# Altium PCB Control_Board.PcbDoc (part 1 of 2)
Units mm, origin at the board's own origin, x right, y up, seen from the top; angles counter-clockwise.
Board outline 126.25 x 36.25 mm, 2 copper layers (Top Layer, Bottom Layer); 76 components, 131 nets, 425 pads, 63 vias.
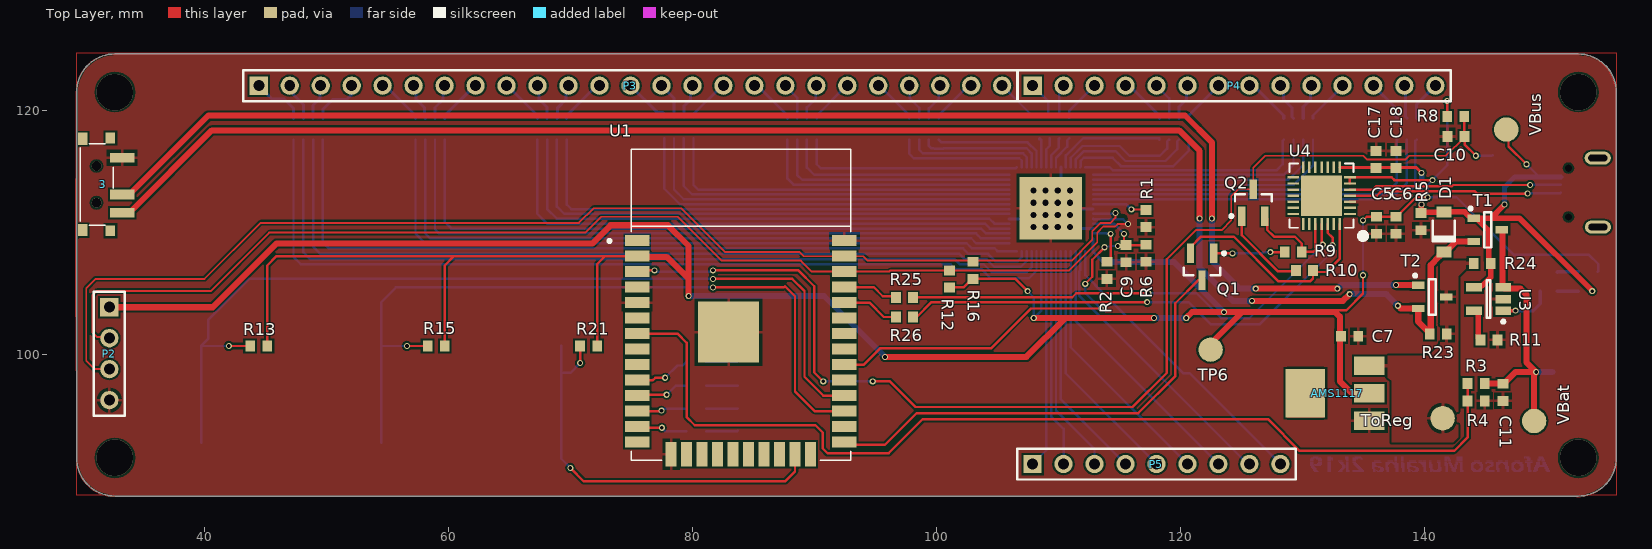
[diagram p0: Top Layer view]
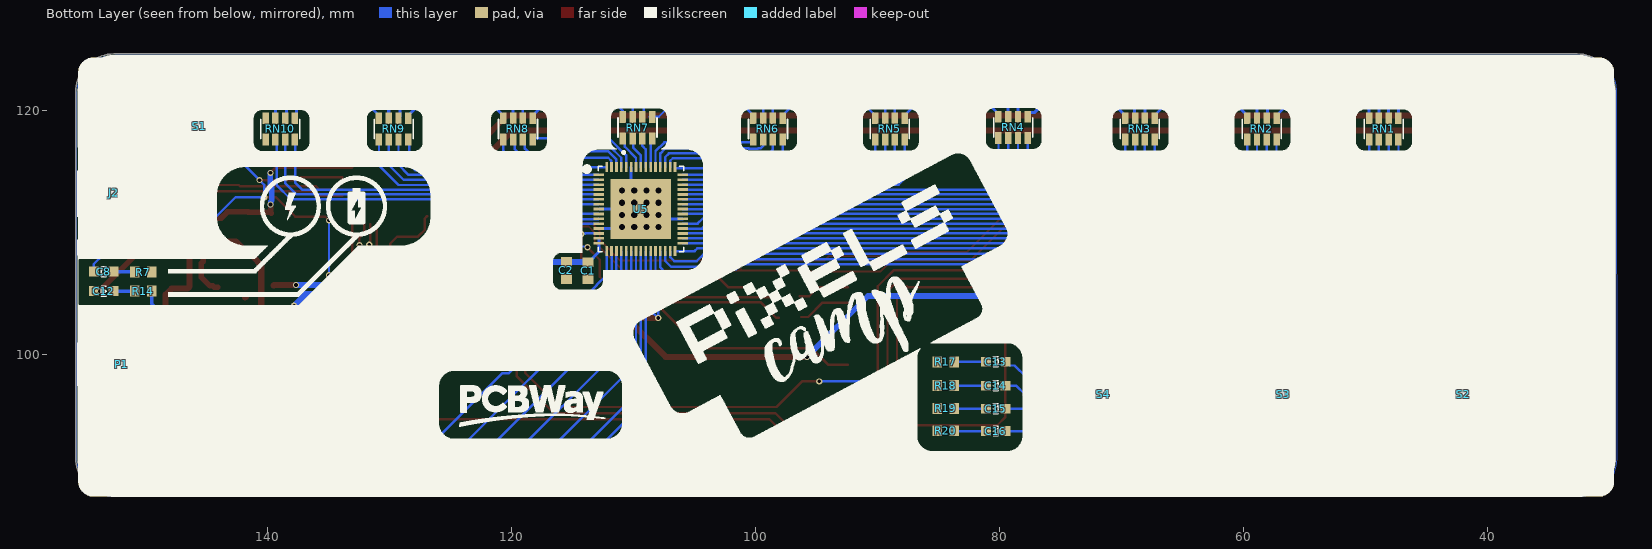
[diagram p1: Bottom Layer view, seen from below]
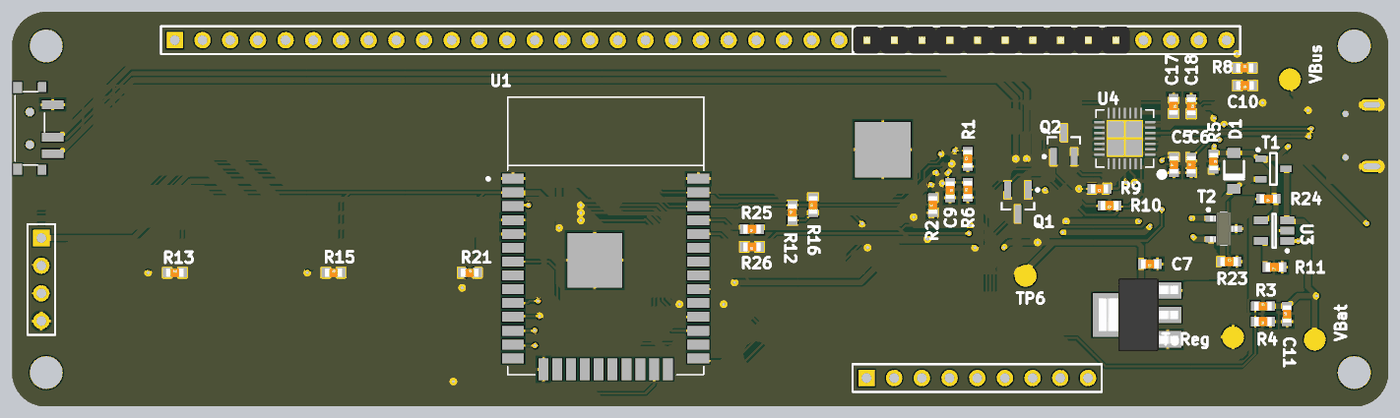
[diagram p3: 3D render of the assembled board from above, using the file's embedded part models]

## Layer stack, top to bottom
Top Solder: solder mask 0.0102, Solder Resist, Dk 3.5
Top Layer: signal copper 0.0356
Dielectric 1: dielectric 0.32, FR-4, Dk 4.8
Bottom Layer: signal copper 0.0356
Bottom Solder: solder mask 0.0102, Solder Resist, Dk 3.5

## Board outline
32.65,88.395 cw(c32.65,91.522) 29.523,91.522 29.523,121.522 cw(c32.65,121.522) 32.65,124.649 152.65,124.649 cw(c152.65,121.522) 155.777,121.522 155.777,91.522 cw(c152.65,91.522) 152.65,88.395

## Design rules (kind name [scope] priority, off if disabled: settings)
Clearance [All] p1: gap=0.152 ignorepadtopadclearanceinfootprint=FALSE except(0.089: Arc-Arc Arc-Track Track-Track)
ComponentClearance [All] p1: gap=0 collisioncheckmode=3 verticalgap=0 showdistances=FALSE
PlaneConnect PlaneConnect_1 [InNet('GND')] p1: planeconnectstyle=Relief reliefexpansion=0.508 reliefentries=4 reliefconductorwidth=0.254 reliefairgap=0.254
PlaneConnect [All] p2: planeconnectstyle=Direct reliefexpansion=0.508 reliefentries=4 reliefconductorwidth=0.254 reliefairgap=0.254
PolygonConnect PolygonConnect_1 [InNet('GND')] p1: connectstyle=Relief reliefconductorwidth=0.254 reliefentries=4 polygonreliefangle="90 Angle" airgapwidth=0.254
PolygonConnect [All] p2: connectstyle=Relief reliefconductorwidth=0.254 reliefentries=4 polygonreliefangle="90 Angle" airgapwidth=0.254
RoutingCorners [All] p1: cornerstyle=Round minsetback=2.54 maxsetback=2.54
RoutingLayers RoutingLayers_1 [All] p1: top layer_v5=TRUE bottom layer_v5=TRUE
RoutingVias [All] p1: holewidth=0.3 width=0.5 viastyle="Through Hole" minholewidth=0.3 minwidth=0.5 maxholewidth=0.3 maxwidth=0.5
ShortCircuit [All] p1: allowed=TRUE
SolderMaskExpansion [All] p1: expansion=0.102
Width [All] p1: maxlimit=2 minlimit=0.089 preferedwidth=0.254
25 further rules are at their usual default settings.

## Components (designator, comment, footprint, x,y, rotation, side; value= is the part's Value field where it differs from the comment)
3 "Footprint of the VIMEX MSK-12C02 SPDT SMD Switch Created by mzst on 17-Jan-2016" MSK-12C02 31.15,113.95 r270 top
AMS1117 "AMS1117" SOT-223-3 136.275,93.575 r90 top
C1 "0.1uF" "C 0603 / 1608" 113.75,106.875 r90 bottom
C2 "1uF" "C 0603 / 1608" 115.525,106.9 r90 bottom
C5 "10uF" "C 0603 / 1608" 136.1,110.6 r90 top
C6 "1uF" "C 0603 / 1608" 137.7,110.6 r90 top
C7 "22uF" "C 0603 / 1608" 133.9,101.5 r180 top
C8 "LED" "LED 0603(2)" 153.5,106.8 r180 bottom
C9 "0.1uF" "C 0603 / 1608" 115.575,108.275 r270 top
C10 "100nF" "C 0603 / 1608" 142.625,117.875 r180 top
C11 "10uF" "C 0603 / 1608" 146.475,96.895 r90 top
C12 "LED" "LED 0603(2)" 153.5,105.2 r180 bottom
C13 "LED" "LED 0603(2)" 80.275,99.4 r0 bottom
C14 "LED" "LED 0603(2)" 80.285,97.45 r0 bottom
C15 "LED" "LED 0603(2)" 80.285,95.55 r0 bottom
C16 "LED" "LED 0603(2)" 80.285,93.725 r0 bottom
C17 "10uF" "C 0603 / 1608" 136.074,116 r270 top
C18 "1uF" "C 0603 / 1608" 137.7,115.987 r270 top
D1 "B5819W" MCC-SOD123_V 141.625,110.05 r270 top
J2 "MicroUsb" USB-MICROB 155.702,116.48 r270 bottom
P1 "53261-0271" MOLX-53261-0271_V 152,99.2 r270 bottom
P2 "Header 4" HDR1X4 32.2,103.88 r270 top
P3 "Header 25" HDR1X25 44.45,122.047 r0 top locked
P4 "Header 14" HDR1X14 107.91,122.047 r0 top locked
P5 "Header 9" HDR1X9 107.9,91.022 r0 top
Q1 "MMBT2222LT1G" ONSC-SOT-23-3-318-08_M 121.8,107.2 r270 top
Q2 "MMBT2222LT1G" ONSC-SOT-23-3-318-08_M 126,112.45 r90 top
R1 "Res1" "C 0603 / 1608" 117.2,111.15 r90 top value=100k
R2 "Res1" "C 0603 / 1608" 114,106.9 r90 top value=10k
R3 "Res1" "C 0603 / 1608" 144.275,97.625 r0 top value=100k
R4 "Res1" "C 0603 / 1608" 144.275,96.2 r180 top value=100k
R5 "Res1" "C 0603 / 1608" 139.75,110.9 r270 top value=10k
R6 "Res1" "C 0603 / 1608" 117.2,108.3 r90 top value=100k
R7 "Res1" "C 0603 / 1608" 150.225,106.75 r180 bottom value=1k
R8 "Res1" "C 0603 / 1608" 142.6,119.5 r0 top value=10k
R9 "Res1" "C 0603 / 1608" 129.276,108.412 r180 top value=10k
R10 "Res1" "C 0603 / 1608" 130.2,106.873 r180 top value=10k
R11 "Res1" "C 0603 / 1608" 145.325,101.2 r180 top value=4.7k
R12 "Res1" "C 0603 / 1608" 101.1,106.2 r90 top value=4.7k
R13 "Res1" "C 0603 / 1608" 44.45,100.7 r0 top value=10k
R14 "Res1" "C 0603 / 1608" 150.225,105.2 r0 bottom value=1k
R15 "Res1" "C 0603 / 1608" 59,100.7 r0 top value=10k
R16 "Res1" "C 0603 / 1608" 103,106.9 r90 top value=4.7k
R17 "Res1" "C 0603 / 1608" 84.425,99.4 r0 bottom value=1k
R18 "Res1" "C 0603 / 1608" 84.425,97.45 r0 bottom value=1k
R19 "Res1" "C 0603 / 1608" 84.425,95.575 r0 bottom value=1k
R20 "Res1" "C 0603 / 1608" 84.425,93.75 r0 bottom value=1k
R21 "Res1" "C 0603 / 1608" 71.5,100.7 r0 top value=10k
R23 "Res1" "C 0603 / 1608" 141.175,101.7 r0 top value=OPEN
R24 "Res1" "C 0603 / 1608" 144.775,107.475 r180 top value=OPEN
R25 "Res1" "C 0603 / 1608" 97.4,104.68 r180 top value=470
R26 "Res1" "C 0603 / 1608" 97.4,103.08 r180 top value=470
RN1 "742C083121JP" RESARRAY(4x0603) 48.5,118.5 r180 bottom
RN2 "742C083121JP" RESARRAY(4x0603) 58.5,118.5 r180 bottom
RN3 "742C083121JP" RESARRAY(4x0603) 68.5,118.5 r180 bottom
RN4 "742C083121JP" RESARRAY(4x0603) 78.9,118.625 r180 bottom
RN5 "742C083121JP" RESARRAY(4x0603) 89,118.5 r180 bottom
RN6 "742C083121JP" RESARRAY(4x0603) 99,118.5 r180 bottom
RN7 "742C083121JP" RESARRAY(4x0603) 109.7,118.6 r180 bottom
RN8 "742C083121JP" RESARRAY(4x0603) 119.5,118.5 r180 bottom
RN9 "742C083121JP" RESARRAY(4x0603) 129.7,118.5 r180 bottom
RN10 "742C083121JP" RESARRAY(4x0603) 139,118.5 r180 bottom
S1 "Switch" PUSH_SMD_3x4 147.125,121.2 r270 bottom
S2 "DTSM-6" DTSM-6 42,96.755 r90 bottom
S3 "DTSM-6" DTSM-6 56.75,96.755 r90 bottom
S4 "DTSM-6" DTSM-6 71.5,96.755 r90 bottom
T1 "DMP2045U" SOT95P237X112-3N 145.225,110.225 r0 top
T2 "DMP2045U" SOT95P237X112-3N 140.675,104.725 r0 top
ToReg "Test pad" TP20R 141.525,94.775 r0 top
TP6 "Test pad" TP20R 122.5,100.4 r0 top
U1 "ESP32-WROOM-32D" MODULE_ESP32-WROOM-32D 83.975,104.075 r0 top
U3 "MCP73831T-2ADI/OT" SOT-23-OT5_M 145.3,104.55 r180 top
U4 "CP2102-GM" QFN28_5X5 131.6,113.024 r180 top value=Value
U5 "IS31FL3741" QFN40P700X700X80-61N 109.425,111.93 r180 bottom
VBat "Test pad" TP20R 149.025,94.55 r0 top
VBus "Test pad" TP20R 146.75,118.45 r0 top

## Footprints (in the part's own frame and the unit in brackets; to place one, negate y for a bottom-side part, rotate by r counter-clockwise, add the part's x,y. Pads: shape width x height; smd on the part's side, far side on the other; paste and mask are expansions set on the pad)
"C 0603 / 1608" [mm] "Capacitor 0603 / 1608 (1.6 x 0.8 mm)"
  rect 0.8x0.9 smd: 1(-0.7,0) 2(0.7,0)
  body extent -0.8,-0.4 0.8,0.4, height 0.3
DTSM-6 [mil]
  rect 61.02x51.18 smd: 1(-156.5,88.58) 2(156.5,88.58) 3(-156.5,-88.58) 4(156.5,-88.58)
HDR1X4 [mm] "Connector; Header; 4 Position"
  rect 1.5x1.5 hole 0.9: 1(0,0)
  round 1.5 hole 0.9: 2(2.54,0) 3(5.08,0) 4(7.62,0)
  silkscreen extent -1.27,-1.27 8.89,1.27, body extent -1.27,-1.24 8.89,1.25, height 8.54
HDR1X9 [mm] "Connector; Header; 9 Position"
  rect 1.5x1.5 hole 0.9: 1(0,0)
  round 1.5 hole 0.9: 2(2.54,0) 3(5.08,0) 4(7.62,0) 5(10.16,0) 6(12.7,0) 7(15.24,0) 8(17.78,0) 9(20.32,0)
  silkscreen extent -1.27,-1.27 21.59,1.27, body extent -1.27,-1.24 21.59,1.25, height 8.54
HDR1X14 [mm] "Connector; Header; 14 Position"
  rect 1.5x1.5 hole 0.9: 1(0,0)
  round 1.5 hole 0.9: 2(2.54,0) 3(5.08,0) 4(7.62,0) 5(10.16,0) 6(12.7,0) 7(15.24,0) 8(17.78,0) 9(20.32,0) 10(22.86,0) 11(25.4,0) 12(27.94,0) 13(30.48,0) 14(33.02,0)
  silkscreen extent -1.27,-1.27 34.29,1.27, body extent -1.25,-1.24 34.29,1.25, height 8.54
HDR1X25 [mm] "Connector; Header; 25 Position"
  rect 1.5x1.5 hole 0.9: 1(0,0)
  round 1.5 hole 0.9: 2(2.54,0) 3(5.08,0) 4(7.62,0) 5(10.16,0) 6(12.7,0) 7(15.24,0) 8(17.78,0) 9(20.32,0) 10(22.86,0) 11(25.4,0) 12(27.94,0) 13(30.48,0) 14(33.02,0) 15(35.56,0) 16(38.1,0) 17(40.64,0) 18(43.18,0) 19(45.72,0) 20(48.26,0) 21(50.8,0) 22(53.34,0) 23(55.88,0) 24(58.42,0) 25(60.96,0)
  silkscreen extent -1.27,-1.27 62.23,1.27
"LED 0603(2)" [mm]
  rect 0.8x0.8 smd: 1(-0.762,0) 2(0.838,0)
  silkscreen extent -0.16,-0.4 0.24,0.4
MCC-SOD123_V [mil] "SOD123, 2-Leads, Body 2.7x1.6mm, Height 1.35mm"
  rect 35.98x47.99 smd: 1(-64.5,0) 2(64.5,0)
  silkscreen extent -36,-35 31,35, body extent -53,-31 53,31, height 53
MODULE_ESP32-WROOM-32D [mm]
  rect 2x0.9 smd: 1(-8.5,5.26) 2(-8.5,3.99) 3(-8.5,2.72) 4(-8.5,1.45) 5(-8.5,0.18) 6(-8.5,-1.09) 7(-8.5,-2.36) 8(-8.5,-3.63) 9(-8.5,-4.9) 10(-8.5,-6.17) 11(-8.5,-7.44) 12(-8.5,-8.71) 13(-8.5,-9.98) 14(-8.5,-11.25) 25(8.5,-11.25) 26(8.5,-9.98) 27(8.5,-8.71) 28(8.5,-7.44) 29(8.5,-6.17) 30(8.5,-4.9) 31(8.5,-3.63) 32(8.5,-2.36) 33(8.5,-1.09) 34(8.5,0.18) 35(8.5,1.45) 36(8.5,2.72) 37(8.5,3.99) 38(8.5,5.26)
  rect 0.9x2 smd: 15(-5.715,-12.25) 16(-4.445,-12.25) 17(-3.175,-12.25) 18(-1.905,-12.25) 19(-0.635,-12.25) 20(0.635,-12.25) 21(1.905,-12.25) 22(3.175,-12.25) 23(4.445,-12.25) 24(5.715,-12.25)
  rect 5x5 smd: 39(-1,-2.24)
  silkscreen extent -10.88,-12.75 9,12.75
MOLX-53261-0271_V [mm] "Header, 2-Leads, Pitch 1.25mm"
  rect 0.8x1.6 smd: 1(-0.625,1.45) 2(0.625,1.45)
  rect 2.1x3 smd: MP1(-3.175,-1.45) MP2(3.175,-1.45)
  silkscreen extent -1.72,-3.55 1.73,2.92, body extent -3.82,-3.55 3.83,1.65, height 3.41
MSK-12C02 [mil]
  round 31.5 hole 31.5: 1(-59.06,0) 1(59.06,0)
  rect 31.5x78.74 smd: COM(32.4,82.68) L1(91.46,82.68) L2(-85.71,82.68)
  rect 39.37x31.5 smd: GND@1(-147.64,-44.29) GND@4(147.64,-44.29)
  rect 35.43x31.5 smd: GND@2(-149.61,44.29) GND@3(149.61,44.29)
  silkscreen extent -132,-53 132,53, body extent -152,-110 152,87, height 46
ONSC-SOT-23-3-318-08_M [mm] "SOT23, 3-Leads, Body 3.04x1.4mm, Pitch 0.95mm, IPC Low Density"
  rect 1.6x0.6 smd: 1(-1.1,0.95) 2(-1.1,-0.95) 3(1.1,0)
  silkscreen extent -1.22,-1.5 0.7,1.93, body extent -0.7,-1.52 0.7,1.52, height 1.11
PUSH_SMD_3x4 [mm]
  rect 1.35x1.35 smd: 1(0.15,1.5) 2(4.85,1.5)
  silkscreen extent 0,0 5,3
QFN28_5X5 [mil]
  rect 38x8 smd paste+0 mask+0: 1(-91.5,59.06) 2(-91.5,39.37) 3(-91.5,19.69) 4(-91.5,0) 5(-91.5,-19.68) 6(-91.5,-39.37) 7(-91.5,-59.06) 15(91.5,-59.06) 16(91.5,-39.37) 17(91.5,-19.68) 18(91.5,0) 19(91.5,19.69) 20(91.5,39.37) 21(91.5,59.06)
  rect 8x38 smd paste+0 mask+0: 8(-59.06,-91.5) 9(-39.37,-91.5) 10(-19.69,-91.5) 11(0,-91.5) 12(19.68,-91.5) 13(39.37,-91.5) 14(59.06,-91.5) 22(59.06,91.5) 23(39.37,91.5) 24(19.68,91.5) 25(0,91.5) 26(-19.69,91.5) 27(-39.37,91.5) 28(-59.06,91.5)
  rect 132x132 smd paste-65.5 mask+0: 29(0,0)
  silkscreen extent -148,-104 104,145, body extent 0,0 10,10, height 10
QFN40P700X700X80-61N [mm]
  rect 0.84x0.22 smd: 1(-3.445,2.8) 2(-3.445,2.4) 3(-3.445,2) 4(-3.445,1.6) 5(-3.445,1.2) 6(-3.445,0.8) 7(-3.445,0.4) 8(-3.445,0) 9(-3.445,-0.4) 10(-3.445,-0.8) 11(-3.445,-1.2) 12(-3.445,-1.6) 13(-3.445,-2) 14(-3.445,-2.4) 15(-3.445,-2.8) 31(3.445,-2.8) 32(3.445,-2.4) 33(3.445,-2) 34(3.445,-1.6) 35(3.445,-1.2) 36(3.445,-0.8) 37(3.445,-0.4) 38(3.445,0) 39(3.445,0.4) 40(3.445,0.8) 41(3.445,1.2) 42(3.445,1.6) 43(3.445,2) 44(3.445,2.4) 45(3.445,2.8)
  rect 0.22x0.84 smd: 16(-2.8,-3.445) 17(-2.4,-3.445) 18(-2,-3.445) 19(-1.6,-3.445) 20(-1.2,-3.445) 21(-0.8,-3.445) 22(-0.4,-3.445) 23(0,-3.445) 24(0.4,-3.445) 25(0.8,-3.445) 26(1.2,-3.445) 27(1.6,-3.445) 28(2,-3.445) 29(2.4,-3.445) 30(2.8,-3.445) 46(2.8,3.445) 47(2.4,3.445) 48(2,3.445) 49(1.6,3.445) 50(1.2,3.445) 51(0.8,3.445) 52(0.4,3.445) 53(0,3.445) 54(-0.4,3.445) 55(-0.8,3.445) 56(-1.2,3.445) 57(-1.6,3.445) 58(-2,3.445) 59(-2.4,3.445) 60(-2.8,3.445)
  rect 4.95x4.95 smd: 61(0,0)
  silkscreen extent -4.62,-3.5 3.5,3.5
RESARRAY(4x0603) [mm]
  rect 0.53x0.97 smd: 1(-1.2,-0.875) 2(-0.4,-0.875) 3(0.4,-0.875) 4(1.2,-0.875) 5(1.2,0.875) 6(0.4,0.875) 7(-0.4,0.875) 8(-1.2,0.875)
  silkscreen extent -1.6,-2.13 1.6,0.8
SOT95P237X112-3N [mm] "SOT, 0.95mm, pitch; 3 pin,1.30mm W X 2.92mm L X 1.12mm H body, IPC Medium Density"
  rect 1.05x0.6 smd: 1(-1.15,0.95) 2(-1.15,-0.95) 3(1.15,0)
  silkscreen extent -1.52,-1.45 0.3,1.87, body extent -1.25,-1.5 1.25,1.5, height 1.1
SOT-23-OT5_M [mm] "SOT23, 5-Leads, Body 2.9x1.7mm, Pitch 0.95mm, Lead Span 2.8mm, IPC Low Density"
  rect 1.3x0.7 smd: 1(-1.2,0.95) 2(-1.2,0) 3(-1.2,-0.95) 4(1.2,-0.95) 5(1.2,0.95)
  silkscreen extent -1.33,-1.55 0.15,1.97, body extent -0.9,-1.55 0.9,1.55, height 1.45
SOT-223-3 [mm]
  rect 1.5x2.5 smd: 1(1,0.75) 2(3.25,0.75) 3(5.5,0.75)
  rect 4x3.25 smd: ""(3.25,6)
  Top Layer region: 1.25,4.5 5.25,4.5 5.25,7.5 1.25,7.5
  body extent -0.1,-0.22 6.6,7.08, height 1.8
TP20R [mm]
  rrect100% 2x2 smd paste-1: TP(0,0)
USB-MICROB [mm] "G19"
  rect 0.4x2.5 smd: 1(1.9,4.7) 2(2.55,4.7) 3(3.2,4.7) 4(3.85,4.7) 5(4.5,4.7)
  rect 1x1 smd: ""(0.01,4) ""(6.39,4)
  rrect100% 1.05x2.15 hole 0.55 slot 1.55 at 90 deg: ""(0.37,1.45) ""(6.03,1.44)
  round 0 hole 0.6: ""(1.2,3.86) ""(5.2,3.86)

## Part data
3: library part MSK-12C02_SMD_SPDT_SWITCH
AMS1117: "LDO 3.3V/5V/12V"
C1 C2 C5 C6 C7 C9 C10 C11 C17 C18: library part Capacitor
D1: library part CMP-2100-03587-1, "Schottky Barrier Rectifier, 1 A, 40 Vrm, -65 to 125 degC, 2-Pin SOD123, RoHS, Tape and Reel", Manufacturer="Micro Commercial Components", Package Description="2-Pin Small Outline Diode, Body 2.7 x 1.6 mm, Height 1.35 mm", Package Reference=SOD123, Datasheet URL=http://www.mccsemi.com/up_pdf/B5817W-B5819W(SOD-123).pdf, Datasheet Version="Rev. B, 01/2013", Manufacturer URL=http://www.mccsemi.com/, Package URL=http://www.mccsemi.com/up_pdf/1N4448W(SOD-123).pdf
J2: "10103594-0001LF / Conn Micro USB Type B RCP 5 POS 0.65mm Solder RA SMD 5 Terminal 1 Port T/R", Package=None, Availability=Unavailable, MF="Amphenol ICC", MP=10103594-0001LF, Price=None, SnapEDA_Link=https://www.snapeda.com/parts/10103594-0001LF/Amphenol%20ICC/view-part/?ref=snap
P1: library part CMP-2000-05633-1, "PicoBlade(TM) Header, Right Angle, -40 to 85 degC, 2-Pin SMD, RoHS, Tape and Reel", Current - Max=1A, Manufacturer=Molex, Package Description="2-Leads Header, Pitch 1.25 mm, Mated Height 3.4 mm", Package Version="Rev. H, 11/2014", Voltage - Max=125V, =0532610271, Brand=Molex, Contact Material=PhosphorBronze, Contact Plating=Tin, Current Rating=1A, Datasheet URL=http://www.molex.com/webdocs/datasheets/pdf/en-us/0532610271_PCB_HEADERS.pdf, Datasheet Version=03/2016, Factory Pack Quantity=1000, Housing Material=Thermoplastic, Manufacturer URL=http://www.molex.com/, Mounting Angle=Right, Mounting Style=SMD/SMT, Mounting Technology=SurfaceMount, Number of Positions=2, Number of Positions / Contacts=2, Number of Rows=1, Package Reference=53261-0271, Package URL=http://www.molex.com/pdm_docs/sd/532610271_sd.pdf, Packaging=Reel, Pitch=1.25mm, Product Category=1.25mmConnectors, Product Type=Headers, RoHS=Details, Series=53261, Termination Style=SMD, Tradename=PicoBlade, Type=Shrouded, Voltage Rating=125V
P2: "Header, 4-Pin", LatestRevisionDate=17-Jul-2002, LatestRevisionNote="Re-released for DXP Platform.", Publisher="Altium Limited"
P3: "Header, 25-Pin", LatestRevisionDate=17-Jul-2002, LatestRevisionNote="Re-released for DXP Platform.", Publisher="Altium Limited"
P4: "Header, 14-Pin", LatestRevisionDate=17-Jul-2002, LatestRevisionNote="Re-released for DXP Platform.", Publisher="Altium Limited"
P5: "Header, 9-Pin", LatestRevisionDate=17-Jul-2002, LatestRevisionNote="Re-released for DXP Platform.", Publisher="Altium Limited"
Q1 Q2: library part CMP-0722-00001-1, "General Purpose Transistor, NPN, 0.6 A IC Continuous, 3-Pin SOT23, RoHS, Tape and Reel", Manufacturer="ON Semiconductor", ComponentLink1Description="Manufacturer URL", ComponentLink1URL=http://www.onsemi.com/, ComponentLink2Description=Datasheet, ComponentLink2URL=http://www.onsemi.com/pub_link/Collateral/MMBT2222LT1-D.PDF, ComponentLink3Description="Package Specification", ComponentLink3URL=http://www.onsemi.com/pub_link/Collateral/MMBT2222LT1-D.PDF, DatasheetVersion="Rev. 10", FT="250 MHz", HFE Max.=300, HFE Min.=100, IC Continuous="0.6 A", Mounting Technology="Surface Mount", PackageDescription="3-Pin SOT23, Body 2.9 x 1.3 mm, Pitch 0.95 mm", PackageReference=SOT-23-3, PackageVersion="Rev. AP", Packing="Tape and Reel", PartNumber=MMBT2222LT1G, Polarity=NPN, PTM Max.="0.225 W", RoHS=TRUE, V(BR) CEO="30 V Min."
R1 R2 R3 R4 R5 R6 R7 R8 R9 R10 R11 R12 R13 R14 R15 R16 R17 R18 R19 R20 R21 R23 R24 R25 R26: "Resistor", LatestRevisionDate=17-Jul-2002, LatestRevisionNote="Re-released for DXP Platform.", PackageDescription="Axial Device, Thru-Hole; 2 Leads; 0.3 in Pin Spacing", PackageReference=AXIAL-0.3, Published=8-Jun-2000, Publisher="Altium Limited"
RN1 RN2 RN3 RN4 RN5 RN6 RN7 RN8 RN9 RN10: library part "Resistor Array 4x", "Res Thick Film Array 120 Ohm 5% 1/4W ±200ppm/°C ISOL Molded 8-Pin 1206_4 X 0603_ Concave SMD Paper T/R", Package="1206 CTS Components", Availability=Unavailable, MF="CTS Resistor", MP=742C083121JP, Price=None, SnapEDA_Link=https://www.snapeda.com/parts/742C083121JP/CTS%20Resistor%20Products/view-part/?ref=snap
S1: library part B3U-1000P, Manufacturer=Omron, DIGIKEY=SW1020CT-ND, MPN=B3U-1000P
T1 T2: library part Si2333CDS-T1-GE3, "P-CHANNEL MOSFET WITH DIODE", Case=SOT23-3, Manufacturer="VISHAY SILICONIX", Author="CERN DEM JLC", Bonding=No, ComponentHeight=1.12mm, Component Type=Standard, CreateDate=03/03/2011, Device=Si2333CDS-T1-GE3, HelpURL=\\cern.ch\dfs\Applications\Altium\Datasheets\Si2333CDS-T1-GE3.pdf, LatestRevisionDate=02/05/2011, Manufacturer Part Number=Si2333CDS-T1-GE3, Mounted=Yes, PackageDescription="SOT, 0.95mm, pitch; 3 pin,1.30mm W X 2.92mm L X 1.12mm H body, IPC Medium Density", Part Description="-12V -5.1A P-Channel  TrenchFET® Power MOSFET", Part Number=Si2333CDS-T1-GE3, Pin Count=3, PressFit=No, Sense=No, SMD=Yes, Socket=No
ToReg TP6 VBat VBus: library part TPTP20R
U1: "IC: SoC; GPIO, I2C, I2S, IR, SD, SDIO, SPI, UART; 2.7÷3.6VDC; 20dBm", Package="Module Espressif Systems", Availability=Warning, MF="Espressif Systems", MP=ESP32-WROOM-32D, Price="3.98 USD", SnapEDA_Link=https://www.snapeda.com/parts/ESP32-WROOM-32D/Espressif%20Systems/view-part/?ref=snap
U3: library part CMP-0133-00142-1, "Miniature Single-Cell, Fully Integrated Li-Ion, Li-Polymer Charge Management Controller, 4.2V, 5-Pin SOT-23, Industrial Temperature, Tape and Reel", Code_IPC=SOT23-5, DatasheetVersion="revE, Sep-2008", PackageDescription="5-Lead Plastic Small Outline Transistor (OT) [SOT-23]", PackageReference=SOT-23-OT5, PackageVersion="revBB, Aug-2009"
U4: "No Description Available", Built_By=EMA_UL_Team, Copyright="Copyright (C) 2018 Accelerated Designs. All rights reserved", Manufacturer_Part_Number=CP2102-GM, RefDes=RefDes, Type=DEV, Vendor="Silicon Labs"

## Free pads (board coordinates)
  round 1 hole 0.5: 0(107.965,113.45) 2(108.965,113.45) 3(109.965,113.45) 4(110.965,113.45) 5(110.965,112.45) 6(109.965,112.45) 7(108.965,112.45) 8(107.965,112.45) 9(107.965,111.45) 10(108.965,111.45) 11(109.965,111.45) 12(110.965,111.45) 13(110.965,110.45) 14(109.965,110.45) 15(108.965,110.45) 16(107.965,110.45)
  rect 5.1x5.1 smd: 0(109.4,112)

## Via types
v1: diameter 0.5, hole 0.3, Top Layer to Bottom Layer, 59 vias
v2: diameter 3, hole 3, Top Layer to Bottom Layer, 4 vias

## Nets (pads, with @x,y where several pads share a name; then routed paths per layer and width w, separated by ;. In a path a pad name is that pad's centre, name@x,y a point inside that pad or via, vN(x,y) a via of type N, cw(c..) or ccw(c..) an arc to the next point about the centre after c; other vN are vias at no path point)
CS1: P3.1 RN1.5 | length 4.4
  Bottom Layer w0.25: P3.1@44.45,122.047 45.56,120.937 46.563,120.937 47.3,120.2 RN1.5@47.3,119.375
CS2: P3.2 RN1.6 | length 3.1
  Bottom Layer w0.25: P3.2@46.99,122.047 46.99,121.61 48.1,120.5 RN1.6@48.1,119.375
CS3: P3.3 RN1.7 | length 2.9
  Bottom Layer w0.25: RN1.7@48.9,119.375 48.9,120.437 49.485,121.022 49.485,122.002 P3.3@49.53,122.047
CS4: P3.4 RN1.8 | length 4.3
  Bottom Layer w0.25: RN1.8@49.7,119.375 49.7,120.1 50.5,120.9 51.65,120.9 52.07,121.32 P3.4@52.07,122.047
CS5: P3.5 RN2.5 | length 3.9
  Bottom Layer w0.25: P3.5@54.61,122.047 54.848,122.047 57.3,119.595 RN2.5@57.3,119.375
CS6: P3.6 RN2.6 | length 3.1
  Bottom Layer w0.25: P3.6@57.15,122.047 57.355,121.842 57.355,120.922 58.042,120.235 58.042,119.433 RN2.6@58.1,119.375
CS7: P3.7 RN2.7 | length 3
  Bottom Layer w0.25: RN2.7@58.9,119.375 58.9,120.257 59.565,120.922 59.565,121.922 P3.7@59.69,122.047
CS8: P3.8 RN2.8 | length 3.8
  Bottom Layer w0.25: RN2.8@59.7,119.375 59.7,119.595 62.152,122.047 P3.8@62.23,122.047
CS9: P3.9 RN3.5 | length 3.8
  Bottom Layer w0.25: P3.9@64.77,122.047 64.848,122.047 67.3,119.595 RN3.5@67.3,119.375
CS10: P3.10 RN3.6 | length 3
  Bottom Layer w0.25: P3.10@67.31,122.047 67.435,121.922 67.435,120.922 68.1,120.257 RN3.6@68.1,119.375
CS11: P3.11 RN3.7 | length 3.1
  Bottom Layer w0.25: RN3.7@68.9,119.375 68.958,119.433 68.958,120.235 69.645,120.922 69.645,121.842 P3.11@69.85,122.047
CS12: P3.12 RN3.8 | length 3.9
  Bottom Layer w0.25: RN3.8@69.7,119.375 69.7,119.595 72.152,122.047 P3.12@72.39,122.047
CS13: P3.13 RN4.5 | length 4
  Bottom Layer w0.25: P3.13@74.93,122.047 77.117,119.86 77.56,119.86 77.7,119.72 RN4.5@77.7,119.5
CS14: P3.14 RN4.6 | length 3
  Bottom Layer w0.25: P3.14@77.47,122.047 78.5,121.017 RN4.6@78.5,119.5
CS15: P3.15 RN4.7 | length 2.8
  Bottom Layer w0.25: RN4.7@79.301,119.501 79.301,120.36 79.863,120.922 79.863,121.9 P3.15@80.01,122.047
CS16: P3.16 RN4.8 | length 3.6
  Bottom Layer w0.25: RN4.8@80.1,119.5 80.1,119.72 82.427,122.047 P3.16@82.55,122.047
CS17: P3.17 RN5.5 | length 3.9
  Bottom Layer w0.25: P3.17@85.09,122.047 85.348,122.047 87.8,119.595 RN5.5@87.8,119.375
CS18: P3.18 RN5.6 | length 3.1
  Bottom Layer w0.2: P3.18@87.63,122.047 88.6,121.077 RN5.6@88.6,119.375
CS19: P3.19 RN5.7 | length 3
  Bottom Layer w0.2: RN5.7@89.4,119.375 89.4,120.26 90.137,120.997 90.137,122.014 P3.19@90.17,122.047
CS20: P3.20 RN5.8 | length 3.7
  Bottom Layer w0.2: RN5.8@90.2,119.375 90.2,119.595 92.652,122.047 P3.20@92.71,122.047
CS21: P3.21 RN6.5 | length 3.8
  Bottom Layer w0.2: P3.21@95.25,122.047 95.348,122.047 97.8,119.595 RN6.5@97.8,119.375
CS22: P3.22 RN6.6 | length 3
  Bottom Layer w0.2: P3.22@97.79,122.047 97.843,121.994 97.843,120.997 98.6,120.24 RN6.6@98.6,119.375
CS23: P3.23 RN6.7 | length 3.1
  Bottom Layer w0.2: RN6.7@99.4,119.375 99.4,120.18 100.217,120.997 100.217,121.934 P3.23@100.33,122.047
CS24: P3.24 RN6.8 | length 3.9
  Bottom Layer w0.2: RN6.8@100.2,119.375 100.2,119.595 102.652,122.047 P3.24@102.87,122.047
CS25: P3.25 RN7.5 | length 4.3
  Bottom Layer w0.2: P3.25@105.41,122.047 107.957,119.5 RN7.5@108.7,119.5
CS26: P4.1 RN7.6 | length 2.8
  Bottom Layer w0.2: P4.1@107.91,122.047 109.2,120.757 RN7.6@109.2,119.8
CS27: P4.2 RN7.7 | length 2.5
  Bottom Layer w0.2: RN7.7@110.1,119.7 110.1,121.697 P4.2@110.45,122.047
CS28: P4.3 RN7.8 | length 3.3
  Bottom Layer w0.2: RN7.8@110.9,119.4 RN7.8@110.9,119.475 ; RN7.8@110.9,119.7 110.9,119.957 P4.3@112.99,122.047
CS29: P4.4 RN8.5 | length 4
  Bottom Layer w0.25: P4.4@115.53,122.047 115.848,122.047 118.3,119.595 RN8.5@118.3,119.375
CS30: P4.5 RN8.6 | length 3.1
  Bottom Layer w0.2: P4.5@118.07,122.047 119.1,121.017 RN8.6@119.1,119.375
CS31: P4.6 RN8.7 | length 3
  Bottom Layer w0.25: RN8.7@119.9,119.375 119.9,120.297 120.525,120.922 120.525,121.962 P4.6@120.61,122.047
CS32: P4.7 RN8.8 | length 3.7
  Bottom Layer w0.25: RN8.8@120.7,119.375 120.7,119.595 123.15,122.045 P4.7@123.15,122.047
CS33: P4.8 RN9.5 | length 4
  Bottom Layer w0.25: P4.8@125.69,122.047 126.048,122.047 128.5,119.595 RN9.5@128.5,119.375
CS34: P4.9 RN9.6 | length 3.1
  Bottom Layer w0.25: P4.9@128.23,122.047 128.469,121.808 128.469,120.948 129.182,120.235 129.182,119.493 RN9.6@129.3,119.375
CS35: P4.10 RN9.7 | length 2.9
  Bottom Layer w0.25: RN9.7@130.1,119.375 130.1,120.317 130.705,120.922 130.705,121.982 P4.10@130.77,122.047
CS36: P4.11 RN9.8 | length 3.7
  Bottom Layer w0.25: RN9.8@130.9,119.375 130.9,119.595 133.31,122.005 P4.11@133.31,122.047
CS37: P4.12 RN10.5 | length 3.5
  Bottom Layer w0.25: P4.12@135.85,122.047 137.662,120.235 137.662,119.513 RN10.5@137.8,119.375
CS38: P4.13 RN10.6 | length 2.8
  Bottom Layer w0.25: P4.13@138.39,122.047 138.495,121.942 138.495,119.48 RN10.6@138.6,119.375
CS39: P4.14 RN10.7 | length 3.3
  Bottom Layer w0.25: RN10.7@139.4,119.375 139.4,120.517 P4.14@140.93,122.047
CTS: U4.23
D+: J2.3 U4.4 | length 17.6
  Top Layer w0.2: U4.4@133.924,113.024 136.124,113.024 136.502,113.402 144.154,113.402 144.357,113.2 v1(148.5,113.2)
  Bottom Layer w0.2: v1(148.5,113.2) 148.531,113.231 151.194,113.231 J2.3@151.225,113.262
D-: J2.2 U4.5 | length 17.5
  Top Layer w0.2: U4.5@133.924,113.524 135.8,113.524 136.074,113.798 142.295,113.798 142.397,113.9 v1(148.7,113.9)
  Bottom Layer w0.2: v1(148.7,113.9) 148.712,113.913 J2.2@151.225,113.913
DCD: U4.1
DSR: U4.27
DTR: Q1.2 R10.1 U4.28 | length 18.7
  Top Layer w0.2: Q1.2@120.85,108.8 121.725,109.675 124.4,109.675 128.075,106 130.654,106 130.9,106.246 R10.1@130.9,106.873 ; R10.1@131.007,106.765 132,106.765 133.1,107.865 U4.28@133.1,110.7
  Top Layer w0.25: Q1.2@120.85,108.3 Q1.2@120.85,108.8 ; R10.1@130.9,106.873 R10.1@131.007,106.765
ESP_SW1: R21.1 S4.3 S4.4 U1.23 | length 34.2
  Top Layer w0.2: v1(70,90.7) 71.1,89.6 87.6,89.6 88.42,90.42 U1.23@88.42,91.825 ; v1(70.8,99.3) R21.1@70.8,100.7
  Bottom Layer w0.2: S4.4@69.25,100.73 69.25,98.5 ; v1(70,90.7) 69.25,91.45 S4.3@69.25,92.78 69.25,98.5 ; v1(70.8,99.3) 70,98.5 69.25,98.5
ESP_SW2: R15.1 S3.3 S3.4 U1.27 | length 62.7
  Top Layer w0.2: v1(56.6,100.7) R15.1@58.3,100.7 ; v1(81.7,105.5) 87.5,105.5 87.6,105.6 88.42,104.78 88.42,96.98 90.035,95.365 U1.27@92.475,95.365
  Bottom Layer w0.2: S3.3@54.5,92.78 S3.4@54.5,100.73 ; v1(56.6,100.7) 54.53,100.7 S3.4@54.5,100.73 ; v1(81.7,105.5) 55.7,105.5 54.5,104.3 S3.4@54.5,100.73
ESP_SW3: R13.1 S2.3 S2.4 U1.28 | length 75.9
  Top Layer w0.2: v1(42,100.7) R13.1@43.75,100.7 ; v1(81.7,106.2) 88.2,106.2 89.2,105.2 89.2,98.175 90.74,96.635 U1.28@92.475,96.635
  Bottom Layer w0.2: S2.3@39.75,92.78 S2.4@39.75,100.73 ; v1(42,100.7) 39.78,100.7 S2.4@39.75,100.73 ; v1(81.7,106.2) 43.654,106.2 40.3,102.846 40.3,101.28 S2.4@39.75,100.73
GND: 3.L2 AMS1117.1 C1.1 C2.1 C5.1 C6.1 C7.1 C9.2 C10.2 C11.1 C17.1 C18.1 J2.5 P1.1 P2.4 pad.0 pad.2 pad.3 pad.4 pad.5 pad.6 pad.7 pad.8 pad.9 pad.10 pad.11 pad.12 pad.13 pad.14 pad.15 pad.16 R1.1 R2.1 R4.1 R5.2 R6.1 R7.2 R11.1 R17.2 R18.2 R19.2 R20.2 S1.1 S2.1 S2.2 S3.1 S3.2 S4.1 S4.2 U1.4 U1.5 U1.15 U1.38 U1.39 U3.2 U4.3 U5.8 U5.12 U5.36 U5.55 | length 15.6
  Bottom Layer w0.25: U5.36@105.98,111.13 108.625,111.13 109.425,111.93 109.536,111.819 110.475,112.757 111.532,112.757 111.532,111.93 ; pad.6@109.955,112.46 110.225,112.73 U5.55@110.225,115.375 ; 110.432,111.93 111.532,111.93 ; U5.8@112.87,111.93 111.532,111.93 ; U5.12@112.895,110.33 U5.12@112.87,110.33 111.532,110.33 111.532,111.93
GPIO0: Q1.3 U1.25 | length 38.5
  Top Layer w0.2: U1.25@92.475,92.825 92.7,92.6 95.8,92.6 98.4,95.2 116.571,95.2 119.617,98.246 119.617,98.412 119.6,98.429 119.6,104.2 121.5,106.1 Q1.3@121.8,106.1
LED_1: C13.1 U1.10 | length 4.7
  Top Layer w0.2: U1.10@75.475,97.905 76.775,97.905 76.97,98.1 v1(77.775,98.1)
  Bottom Layer w0.2: v1(77.775,98.1) 78.775,99.1 79.213,99.1 C13.1@79.513,99.4
LED_2: C14.1 U1.11 | length 4.4
  Top Layer w0.2: U1.11@75.475,96.635 75.54,96.7 v1(77.9,96.7)
  Bottom Layer w0.2: v1(77.9,96.7) 78.65,97.45 C14.1@79.523,97.45
LED_3: C15.1 U1.12 | length 4.1
  Top Layer w0.2: U1.12@75.475,95.365 77.435,95.365 v1(77.47,95.4)
  Bottom Layer w0.2: v1(77.47,95.4) 77.62,95.55 C15.1@79.523,95.55
LED_4: C16.1 U1.13 | length 4.2
  Top Layer w0.2: U1.13@75.475,94.095 75.57,94 v1(77.5,94)
  Bottom Layer w0.2: v1(77.5,94) 77.775,93.725 C16.1@79.523,93.725
Net3_COM: 3.COM T2.1 | length 120.7
  Top Layer w0.5: 3.COM@33.25,113.127 33.85,113.127 40.323,119.6 120.4,119.6 122.6,117.4 v1(122.6,111.15) ; v1(126.2,105.4) v1(132.9,105.4) ; v1(137.7,105.7) 139.5,105.7 T2.1@139.525,105.675
  Bottom Layer w0.5: v1(122.6,111.15) 122.6,107.7 124.9,105.4 v1(126.2,105.4) ; v1(132.9,105.4) 133.2,105.7 v1(137.7,105.7)
Net3_L1: 3.L1 D1.2 R23.1 T1.2 T2.2 | length 133.7
  Top Layer w0.5: 3.L1@33.25,111.627 33.85,111.627 40.6,118.377 119.923,118.377 121.6,116.7 v1(121.6,111.15) ; v1(125.9,104.4) 133.35,104.4 v1(133.9,104.95) ; v1(137.861,104) 138.086,103.775 T2.2@139.525,103.775 139.525,102.7 140.475,101.75 R23.1@140.475,101.7 140.55,101.775 140.55,107.337 141.265,108.052 141.265,108.205 141.473,108.412 D1.2@141.625,108.412 141.777,108.412 142.641,109.275 T1.2@144.075,109.275
  Bottom Layer w0.5: v1(121.6,111.15) 121.6,107.125 124.325,104.4 v1(125.9,104.4) ; v1(133.9,104.95) 136.911,104.95 v1(137.861,104)
NetAMS1117_3: AMS1117.3 R23.2 R24.2 T2.3 ToReg.TP | length 0.4
  Top Layer w0.5: AMS1117.3@135.525,99.075 AMS1117.3@135.7,98.9 ; ToReg.TP@141.525,94.775 ToReg.TP@141.6,94.85 ; T2.3@141.825,104.725 141.837,104.725 T2.3@141.887,104.675
NetC8_2: C8.2 R7.1 | length 1.8
  Bottom Layer w0.3: R7.1@150.925,106.75 150.975,106.8 C8.2@152.662,106.8
NetC12_2: C12.2 R14.2 | length 1.7
  Bottom Layer w0.3: R14.2@150.925,105.2 C12.2@152.662,105.2
NetC13_2: C13.2 R17.1 | length 2.6
  Bottom Layer w0.2: C13.2@81.113,99.4 R17.1@83.725,99.4
NetC14_2: C14.2 R18.1 | length 2.6
  Bottom Layer w0.2: C14.2@81.123,97.45 R18.1@83.725,97.45
NetC15_2: C15.2 R19.1 | length 2.6
  Bottom Layer w0.2: C15.2@81.123,95.55 83.7,95.55 R19.1@83.725,95.575
NetC16_2: C16.2 R20.1 | length 2.6
  Bottom Layer w0.2: C16.2@81.123,93.725 83.7,93.725 R20.1@83.725,93.75
NetQ1_1: Q1.1 R9.2 | length 5.9
  Top Layer w0.2: Q1.1@122.75,108.3 v1(124.3,108.3) ; v1(127.4,108.4) 128.564,108.4 R9.2@128.576,108.412
  Bottom Layer w0.2: v1(124.3,108.3) 126.75,108.3 126.85,108.4 v1(127.4,108.4)
NetQ2_1: Q2.1 R10.2 | length 7.2
  Top Layer w0.2: Q2.1@125.05,111.35 125.05,109.787 128,106.837 129.465,106.837 R10.2@129.5,106.873
NetR1_2: R1.2 U5.7 | length 4.5
  Top Layer w0.152: v1(116,111.9) 117.15,111.9 R1.2@117.2,111.85
  Bottom Layer w0.2: U5.7@112.87,112.33 115.57,112.33 v1(116,111.9)
NetR2_2: R2.2 U5.13 | length 3.6
  Top Layer w0.2: R2.2@114,107.6 114.002,107.6 114.302,107.9 114.302,109.898 v1(114.3,109.9)
  Bottom Layer w0.2: U5.13@112.87,109.93 113.97,109.93 114,109.9
NetR3_1: R3.1 R4.2 U1.7 | length 83.6
  Top Layer w0.2: U1.7@75.475,101.715 78.785,101.715 79.53,100.97 79.53,94.87 80.2,94.2 90.1,94.2 90.7,93.6 90.7,92.3 91.1,91.9 96.1,91.9 98.9,94.7 127.2,94.7 129.8,92.1 142.475,92.1 143.575,93.2 R4.2@143.575,96.2 R3.1@143.575,97.625
NetR11_2: R11.2 U3.5 | length 2.7
  Top Layer w0.45: U3.5@144.1,103.6 144.325,103.6 144.45,103.475 144.45,101.375 R11.2@144.625,101.2
NetR14_1: R14.1 U3.1 | length 4.3
  Top Layer w0.3: U3.1@146.5,103.6 v1(147.5,103.6)
  Bottom Layer w0.3: v1(147.5,103.6) 148.954,103.6 149.525,104.171 R14.1@149.525,105.2
NetR25_2: R25.2 U1.35 | length 4.2
  Top Layer w0.2: U1.35@92.475,105.525 94.875,105.525 95.62,104.78 R25.2@96.38,104.78
NetR26_2: R26.2 U1.34 | length 4.3
  Top Layer w0.2: U1.34@92.475,104.255 94.52,104.255 95.695,103.08 96.28,103.08
NetRN1_1: RN1.1 U5.29 | length 67
  Bottom Layer w0.2: RN1.1@49.7,117.625 49.7,109.2 50.2,108.7 102.2,108.7 102.65,108.25 104.25,108.25 104.85,107.65 106.677,107.65 107.015,107.988 107.015,108.475 U5.29@107.025,108.485
NetRN1_2: RN1.2 U5.28 | length 69
  Bottom Layer w0.2: RN1.2@48.9,117.625 48.9,108.85 49.5,108.25 101.9,108.25 102.317,107.833 104.15,107.833 ; 104.15,107.8 104.75,107.2 106.95,107.2 107.425,107.675 U5.28@107.425,108.485
NetRN1_3: RN1.3 U5.27 | length 71.1
  Bottom Layer w0.2: RN1.3@48.1,117.625 48.1,108.4 48.7,107.8 101.533,107.8 101.917,107.417 103.9,107.417 ; 103.9,107.4 104.55,106.75 107.425,106.75 107.825,107.15 U5.27@107.825,108.485
NetRN1_4: RN1.4 U5.26 | length 73.1
  Bottom Layer w0.2: RN1.4@47.3,117.625 47.3,108 47.898,107.402 101.198,107.402 101.6,107 103.7,107 104.45,106.25 107.6,106.25 108.225,106.875 U5.26@108.225,108.485
NetRN2_1: RN2.1 U5.33 | length 53.4
  Bottom Layer w0.2: RN2.1@59.7,117.625 59.7,110.88 60.25,110.33 103.67,110.33 104.07,109.93 U5.33@105.98,109.93
NetRN2_2: RN2.2 U5.32 | length 54.7
  Bottom Layer w0.2: RN2.2@58.9,117.625 58.9,110.271 59.241,109.93 60.25,109.93 103.27,109.93 103.67,109.53 U5.32@105.98,109.53
NetRN2_3: RN2.3 U5.31 | length 55.9
  Bottom Layer w0.2: RN2.3@58.1,117.625 58.1,109.93 58.5,109.53 60.5,109.53 102.87,109.53 103.27,109.13 U5.31@105.98,109.13
NetRN2_4: RN2.4 U5.30 | length 57.6
  Bottom Layer w0.2: RN2.4@57.3,117.625 57.3,109.921 58.091,109.13 102.5,109.13 102.93,108.7 104.8,108.7 105.015,108.485 U5.30@106.625,108.485
NetRN3_1: RN3.1 U5.38 | length 41.8
  Bottom Layer w0.2: RN3.1@69.7,117.625 69.7,112.3 70.07,111.93 U5.38@105.98,111.93
NetRN3_2: RN3.2 U5.37 | length 42.8
  Bottom Layer w0.2: RN3.2@68.9,117.625 68.9,112.13 69.5,111.53 U5.37@105.98,111.53
NetRN3_3: RN3.3 U5.35 | length 44.1
  Bottom Layer w0.2: RN3.3@68.1,117.625 68.1,111.93 68.9,111.13 104.37,111.13 104.77,110.73 U5.35@105.98,110.73
NetRN3_4: RN3.4 U5.34 | length 45.3
  Bottom Layer w0.2: RN3.4@67.3,117.625 67.3,111.53 68.1,110.73 104,110.73 104.4,110.33 U5.34@105.98,110.33
NetRN4_1: RN4.1 U5.42 | length 29.9
  Bottom Layer w0.2: RN4.1@80.1,117.75 80.1,113.9 80.47,113.53 U5.42@105.98,113.53
NetRN4_2: RN4.2 U5.41 | length 30.9
  Bottom Layer w0.2: RN4.2@79.3,117.75 79.3,113.83 80,113.13 U5.41@105.98,113.13
NetRN4_3: RN4.3 U5.40 | length 32
  Bottom Layer w0.2: RN4.3@78.5,117.75 78.5,113.53 79.3,112.73 U5.40@105.98,112.73
NetRN4_4: RN4.4 U5.39 | length 33
  Bottom Layer w0.2: RN4.4@77.7,117.75 77.7,113.6 78.97,112.33 U5.39@105.98,112.33